# Altium PCB 555TIMER-PCB-REF2.PcbDoc
Units mil, origin at the board's own origin, x right, y up, seen from the top; angles counter-clockwise.
Board outline 3500 x 1300 mil, 2 copper layers (Top Layer, Bottom Layer), stack 61.756 mil thick; 25 components, 12 nets, 69 pads, 9 vias.
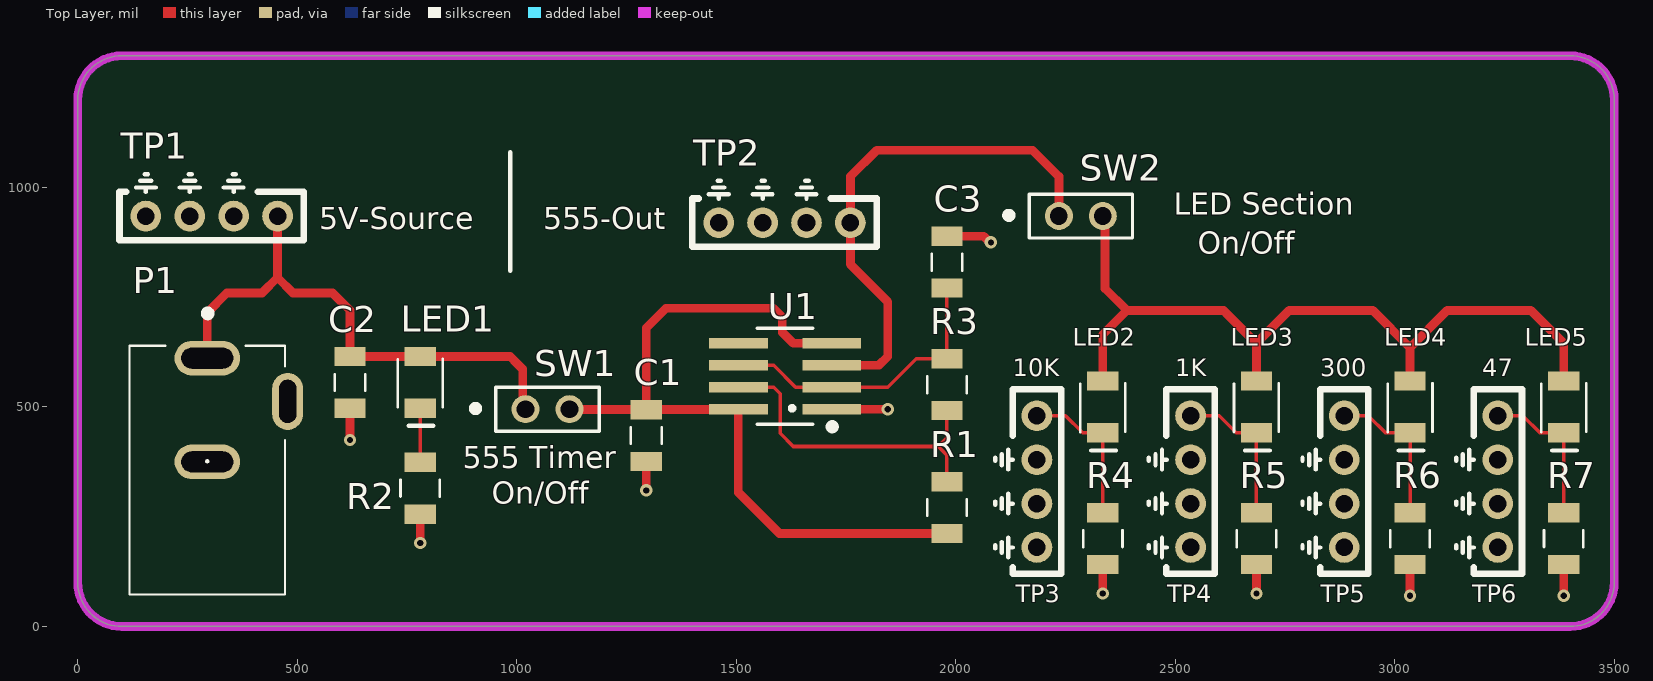
[diagram p0: Top Layer view]
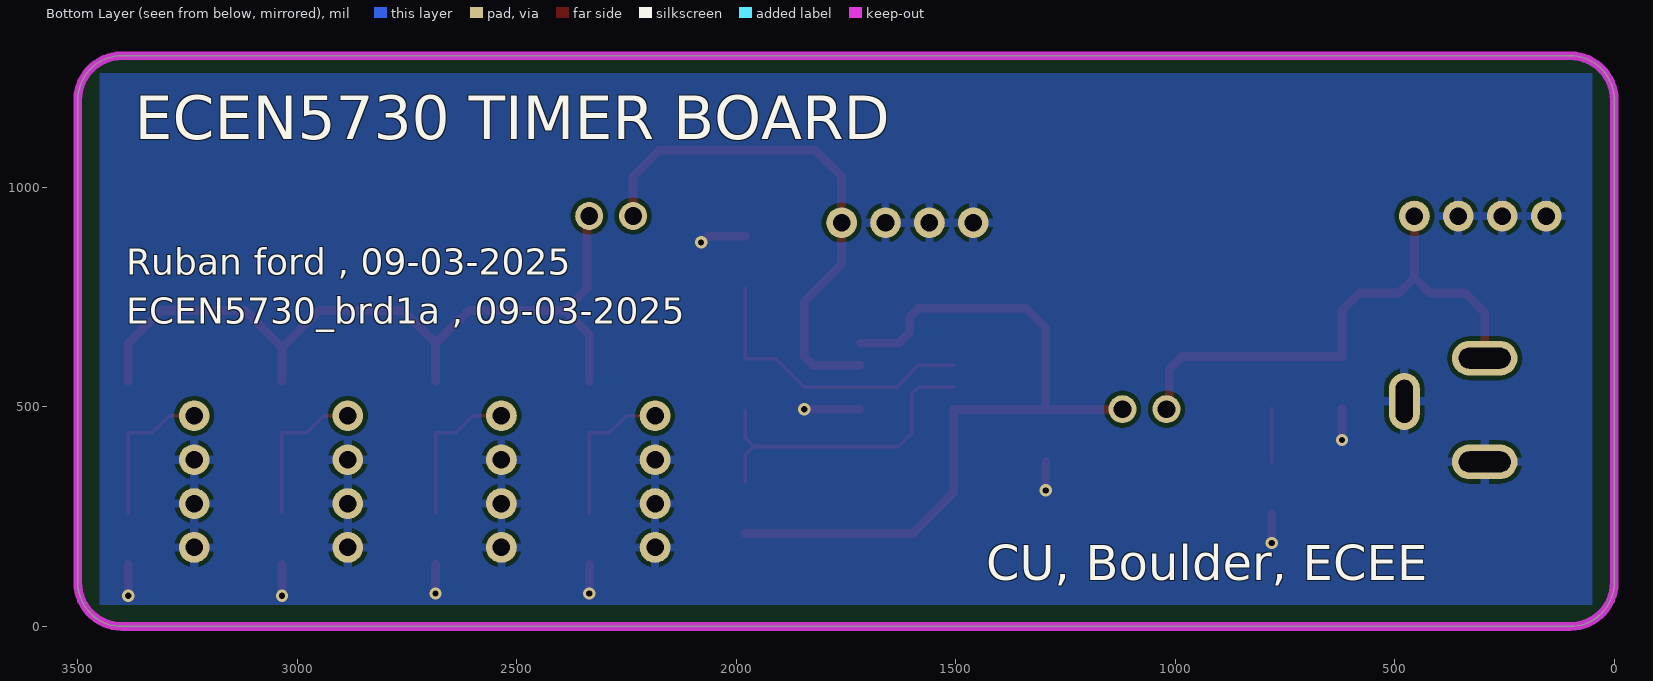
[diagram p1: Bottom Layer view, seen from below]
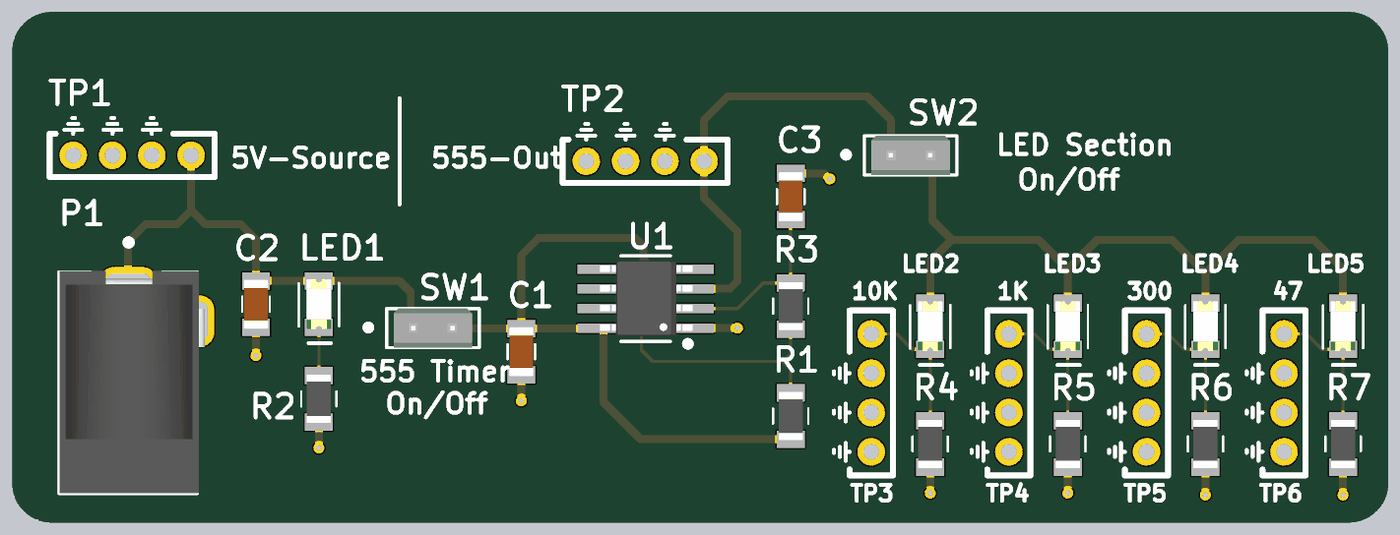
[diagram p2: 3D render of the assembled board from above, using the file's embedded part models]

## Layer stack, top to bottom
Top Solder: solder mask 1, SM-001, Dk 4
Top Layer: signal copper 1.378
Dielectric 1: core 59, Core-043, Dk 4.3
Bottom Layer: signal copper 1.378
Bottom Solder: solder mask 1, SM-001, Dk 4

## Board outline
0,100 0,1200 cw(c100,1200) 100,1300 3400,1300 cw(c3400,1200) 3500,1200 3500,100 cw(c3400,100) 3400,0 100,0 cw(c100,100)

## Design rules (kind name [scope] priority, off if disabled: settings)
AssemblyTestPointUsage [All] p1: isadvanced=TRUE
AssemblyTestpoint [All] p1: isadvanced=TRUE testpointundercomponent=TRUE minsize=40 maxsize=100 preferedsize=60 minholesize=0 maxholesize=40 preferedholesize=32 testpointgrid=1 usegrid=TRUE gridtolerance=0.01 allowsidetop=TRUE allowsidebottom=TRUE
BoardOutlineClearance BoardOutlineClearance_1 [All] p1: isadvanced=TRUE gap=20 ignorepadtopadclearanceinfootprint=FALSE
Clearance Clearance_1 [OnMid vs OnMid] p1: gap=10 ignorepadtopadclearanceinfootprint=FALSE sourcerule=54 cellrowname=All cellrowtype=0 cellcolname=All cellcoltype=0 innerlayers=TRUE
Clearance Clearance_2 [(ExistsOnLayer('Top Layer') Or ExistsOnLayer('Bottom Layer')) vs (ExistsOnLayer('Top Layer') Or ExistsOnLayer('Bottom Layer'))] p2: gap=10 ignorepadtopadclearanceinfootprint=FALSE sourcerule=54 cellrowname=All cellrowtype=0 cellcolname=All cellcoltype=0 outerlayers=TRUE
Clearance [All] p3: gap=10 ignorepadtopadclearanceinfootprint=FALSE ismatrix=TRUE miname0=Power mitype0=2 miname1=DEFAULT mitype1=2 miname2=GND mitype2=2
ComponentClearance [All] p1: isadvanced=TRUE gap=10 collisioncheckmode=3 verticalgap=10 showdistances=FALSE
FabricationTestPointUsage [All] p1: isadvanced=TRUE valid=0 allowmultiple=FALSE
FabricationTestpoint [All] p1: isadvanced=TRUE side=3 testpointundercomponent=TRUE minsize=40 maxsize=100 preferedsize=60 minholesize=0 maxholesize=40 preferedholesize=32 testpointgrid=1 allowsidetop=TRUE allowsidebottom=TRUE usegrid=TRUE gridtolerance=0.01
FanoutControl Fanout_BGA [IsBGA] p1: isadvanced=TRUE bgadir=Out bgaviamode=Centered fanoutstyle=Auto fanoutdirection=Alternating viagrid=1 // Fanout_BGA (Default Rule)
FanoutControl Fanout_LCC [IsLCC] p2: isadvanced=TRUE bgadir=Out bgaviamode=Centered fanoutstyle=Auto fanoutdirection=Alternating viagrid=1 // Fanout_LCC (Default Rule)
FanoutControl Fanout_SOIC [IsSOIC] p3: isadvanced=TRUE bgadir=Out bgaviamode=Centered fanoutstyle=Auto fanoutdirection=Alternating viagrid=1 // Fanout_SOIC (Default Rule)
FanoutControl Fanout_Small [(CompPinCount < 5)] p4: isadvanced=TRUE bgadir=Out bgaviamode=Centered fanoutstyle=Auto fanoutdirection=OutThenIn viagrid=1 // Fanout_Small (Default Rule)
FanoutControl Fanout_Default [All] p5: isadvanced=TRUE bgadir=Out bgaviamode=Centered fanoutstyle=Auto fanoutdirection=Alternating viagrid=1 // Fanout_Default (Default Rule)
Height [All] p1: isadvanced=TRUE minheight=0 maxheight=1000 prefheight=500
HoleSize [All] p1: isadvanced=TRUE absolutevalues=TRUE maxlimit=120 minlimit=1 maxpercent=80.000 minpercent=20.000
HoleToHoleClearance [All] p1: isadvanced=TRUE gap=10 allowstackedmicrovias=TRUE
LayerPairs [All] p1: isadvanced=TRUE enforce=TRUE
MinimumAnnularRing MinimumAnnularRing_1 [All] p1: isadvanced=TRUE minimumring=5
MinimumSolderMaskSliver [All] p1: isadvanced=TRUE minsoldermaskwidth=10
NetAntennae [All] p1: isadvanced=TRUE netantennaetolerance=0
PasteMaskExpansion [All] p1: isadvanced=TRUE expansion=0
PlaneClearance [All] p1: isadvanced=TRUE clearance=20
PlaneConnect [All] p1: isadvanced=TRUE pad.planeconnectstyle=Relief pad.reliefexpansion=20 pad.reliefentries=4 pad.reliefconductorwidth=10 pad.reliefairgap=10 via.planeconnectstyle=Direct via.reliefexpansion=20 via.reliefentries=4 via.reliefconductorwidth=10 via.reliefairgap=10
PolygonConnect PolygonConnectStyle_1 [InNetClass('Power')] p1: thpad.connectstyle=Relief thpad.reliefconductorwidth=20 thpad.reliefentries=4 thpad.polygonreliefangle="90 Angle" thpad.airgapwidth=10 smdpad.connectstyle=Relief smdpad.reliefconductorwidth=20 smdpad.reliefentries=4 smdpad.polygonreliefangle="90 Angle" smdpad.airgapwidth=10 via.connectstyle=Direct via.reliefconductorwidth=10 via.reliefentries=4 via.polygonreliefangle="90 Angle" via.airgapwidth=10
PolygonConnect PolygonConnectStyle_2 [InNetClass('GND')] p2: thpad.connectstyle=Relief thpad.reliefconductorwidth=20 thpad.reliefentries=4 thpad.polygonreliefangle="90 Angle" thpad.airgapwidth=10 smdpad.connectstyle=Relief smdpad.reliefconductorwidth=20 smdpad.reliefentries=4 smdpad.polygonreliefangle="90 Angle" smdpad.airgapwidth=10 via.connectstyle=Direct via.reliefconductorwidth=10 via.reliefentries=4 via.polygonreliefangle="90 Angle" via.airgapwidth=10
PolygonConnect PolygonConnectStyle_3 [InNetClass('DEFAULT')] p3: thpad.connectstyle=Relief thpad.reliefconductorwidth=20 thpad.reliefentries=4 thpad.polygonreliefangle="90 Angle" thpad.airgapwidth=10 smdpad.connectstyle=Relief smdpad.reliefconductorwidth=20 smdpad.reliefentries=4 smdpad.polygonreliefangle="90 Angle" smdpad.airgapwidth=10 via.connectstyle=Direct via.reliefconductorwidth=10 via.reliefentries=4 via.polygonreliefangle="90 Angle" via.airgapwidth=10
PolygonConnect PolygonConnectStyle_4 [InxNetClass('All xNets')] p4: thpad.connectstyle=Relief thpad.reliefconductorwidth=20 thpad.reliefentries=4 thpad.polygonreliefangle="90 Angle" thpad.airgapwidth=10 smdpad.connectstyle=Relief smdpad.reliefconductorwidth=20 smdpad.reliefentries=4 smdpad.polygonreliefangle="90 Angle" smdpad.airgapwidth=10 via.connectstyle=Direct via.reliefconductorwidth=10 via.reliefentries=4 via.polygonreliefangle="90 Angle" via.airgapwidth=10
PolygonConnect PolygonConnectStyle_5 [InDifferentialPairClass('All Differential Pairs')] p5: thpad.connectstyle=Relief thpad.reliefconductorwidth=20 thpad.reliefentries=4 thpad.polygonreliefangle="90 Angle" thpad.airgapwidth=10 smdpad.connectstyle=Relief smdpad.reliefconductorwidth=20 smdpad.reliefentries=4 smdpad.polygonreliefangle="90 Angle" smdpad.airgapwidth=10 via.connectstyle=Direct via.reliefconductorwidth=10 via.reliefentries=4 via.polygonreliefangle="90 Angle" via.airgapwidth=10
PolygonConnect PolygonConnectStyle_6 [All] p6: thpad.connectstyle=Relief thpad.reliefconductorwidth=20 thpad.reliefentries=4 thpad.polygonreliefangle="90 Angle" thpad.airgapwidth=10 smdpad.connectstyle=Relief smdpad.reliefconductorwidth=20 smdpad.reliefentries=4 smdpad.polygonreliefangle="90 Angle" smdpad.airgapwidth=10 via.connectstyle=Direct via.reliefconductorwidth=10 via.reliefentries=4 via.polygonreliefangle="90 Angle" via.airgapwidth=10
RoutingCorners [All] p1: isadvanced=TRUE cornerstyle=45-Degree minsetback=100 maxsetback=100
RoutingPriority [All] p1: isadvanced=TRUE routingpriority=0
RoutingVias RoutingViaStyle_1 [InNetClass('Power')] p1: holewidth=14 width=28 viastyle="Through Hole" minholewidth=14 minwidth=28 maxholewidth=14 maxwidth=28
RoutingVias RoutingViaStyle_2 [InNetClass('GND')] p2: holewidth=14 width=28 viastyle="Through Hole" minholewidth=14 minwidth=28 maxholewidth=14 maxwidth=28
RoutingVias RoutingViaStyle_3 [InNetClass('DEFAULT')] p3: holewidth=14 width=28 viastyle="Through Hole" minholewidth=14 minwidth=28 maxholewidth=14 maxwidth=28
RoutingVias RoutingViaStyle_4 [InxNetClass('All xNets')] p4: holewidth=14 width=28 viastyle="Through Hole" minholewidth=14 minwidth=28 maxholewidth=14 maxwidth=28
RoutingVias RoutingViaStyle_5 [InDifferentialPairClass('All Differential Pairs')] p5: holewidth=14 width=28 viastyle="Through Hole" minholewidth=14 minwidth=28 maxholewidth=14 maxwidth=28
RoutingVias RoutingViaStyle_6 [All] p6: holewidth=14 width=28 viastyle="Through Hole" minholewidth=14 minwidth=28 maxholewidth=14 maxwidth=28
ShortCircuit [All] p1: isadvanced=TRUE allowed=FALSE
SilkToSilkClearance [All] p1: isadvanced=TRUE silktosilkclearance=10
SilkToSolderMaskClearance [IsPad] p1: isadvanced=TRUE minsilkscreentomaskgap=10 clearancetoexposedcopper=TRUE
SolderMaskExpansion [All] p1: isadvanced=TRUE expansion=4 istentingtop=FALSE
SupplyNets "Schematic Supply Nets_2" [InNet('+5V-SOURCE')] p1: isadvanced=TRUE voltage=0.000
SupplyNets "Schematic Supply Nets_1" [InNet('GND')] p2: isadvanced=TRUE voltage=0.000
SupplyNets "Schematic Supply Nets" [InNet('+5V-TIMER')] p3: isadvanced=TRUE voltage=0.000
UnRoutedNet [All] p1: isadvanced=TRUE checkbadconnections=TRUE
UnpouredPolygon [All] p1: isadvanced=TRUE
Width MaxMinWidth_1 [InNetClass('Power')] p1: maxlimit=20 minlimit=15 preferedwidth=20 minimp=50.000000 maximp=50.000000 favimp=50.000000
Width MaxMinWidth_2 [InNetClass('GND')] p2: maxlimit=20 minlimit=15 preferedwidth=20 minimp=50.000000 maximp=50.000000 favimp=50.000000
Width MaxMinWidth_3 [InNetClass('DEFAULT')] p3: maxlimit=8 minlimit=8 preferedwidth=8 minimp=50.000000 maximp=50.000000 favimp=50.000000
Width [All] p4: maxlimit=8 minlimit=8 preferedwidth=8 minimp=50.000000 maximp=50.000000 favimp=50.000000
4 further rules are at their usual default settings.

## Classes and differential pairs
net class DEFAULT: 555-DISCHARGE 555-TRI-THRES LED-1K LED-10K LED-47 LED-300 LED-SOURCE
net class GND: GND
net class Power: 555-OUTPUT +5V-LED +5V-SOURCE +5V-TIMER

## Components (designator, comment, footprint, x,y, rotation, side; value= is the part's Value field where it differs from the comment)
C1 "22uF" 1206_Passive_Capacitor 1295,435 r90 top
C2 "22uF" 1206_Passive_Capacitor 620,556 r90 top
C3 "1uF" 1206_Passive_Capacitor 1980,830 r270 top
LED1 "Red" LED_1206 780,556 r270 top
LED2 "Green" LED_1206 2335,500 r270 top
LED3 "Green" LED_1206 2685,500 r270 top
LED4 "Green" LED_1206 3035,500 r270 top
LED5 "Green" LED_1206 3385,500 r270 top
P1 "Power Jack" Power_Jack 295,611.22 r270 top value="CONN PWR JACK 2X5.5MM SOLDER"
R1 "1k" 1206_Passive_Resitor 1980,271 r270 top value="1K Ohm"
R2 "1k" 1206_Passive_Resitor 780,315 r90 top value="1K Ohm"
R3 "1k" 1206_Passive_Resitor 1980,551 r270 top value="1K Ohm"
R4 "10k" 1206_Passive_Resitor 2335,200 r90 top value=10KOhm
R5 "1k" 1206_Passive_Resitor 2685,200 r90 top value="1K Ohm"
R6 "300 Ohm" 1206_Passive_Resitor 3035,200 r90 top value=300Ohm
R7 "47 Ohms" 1206_Passive_Resitor 3385,200 r90 top value=47Ohm
SW1 "SW_2Pin_100mil_Switch" 2Pin-Header-Conn 1020,495 r0 top
SW2 "SW_2Pin_100mil_Switch" 2Pin-Header-Conn 2235,935 r0 top
TP1 "TP-5V" TP10x_Probe 305,935 r180 top
TP2 "TP-OUT" TP10x_Probe 1610,920 r180 top
TP3 "TP-10KOhm" TP10x_Probe 2185,330 r270 top
TP4 "TP-1KOhm" TP10x_Probe 2535,330 r270 top
TP5 "TP-300Ohm" TP10x_Probe 2885,330 r270 top
TP6 "TP-47Ohm" TP10x_Probe 3235,330 r270 top
U1 "NE555DR" TS555IDTTR 1611.3,570 r180 top

## Footprints (in the part's own frame and the unit in brackets; to place one, negate y for a bottom-side part, rotate by r counter-clockwise, add the part's x,y. Pads: shape width x height; smd on the part's side, far side on the other; paste and mask are expansions set on the pad)
2Pin-Header-Conn [mm]
  round 1.62 hole 1.02: 1(0,0) 2(2.54,0)
  silkscreen extent -3.02,-1.27 4.26,1.26, body extent -1.27,-1.27 3.81,1.27, height 8.13
1206_Passive_Capacitor [mil]
  rect 44x71 smd: 1(-59,0) 2(59,0)
  silkscreen extent -19,-35 19,35, body extent -63,-31 63,32, height 50
1206_Passive_Resitor [mil]
  rect 44x71 smd: 1(-59,0) 2(59,0)
  silkscreen extent -19,-45 19,45, body extent -61,-31 61,31, height 26
LED_1206 [mil]
  rect 44x71 smd: 1(-59,0) 2(59,0)
  silkscreen extent -54,-51 99,51, body extent -63,-31 63,31, height 28
Power_Jack [mm]
  oval 2x3.8 hole 1.2 slot 3 at 90 deg: 1(0,0) 2(6,0)
  oval 3.3x1.8 hole 1 slot 2.5 at 0 deg: 3(2.5,4.65)
  silkscreen extent -2.79,-4.5 13.68,4.5, body extent -0.76,-4.45 13.64,4.95, height 11.49
TP10x_Probe [mil] "Small Probs footprint"
  round 70 hole 40: 1(-150,0) 2(-50,0) 2(50,0) 2(150,0)
  silkscreen extent -210,-95 210,55
TS555IDTTR [mm] "IC OSC Single Timer 2.7MHz 8SOIC"
  rect 3.4x0.6 smd: 1(-2.7,1.905) 2(-2.7,0.635) 3(-2.7,-0.635) 4(-2.7,-1.905) 5(2.7,-1.905) 6(2.7,-0.635) 7(2.7,0.635) 8(2.7,1.905)
  silkscreen extent -2.85,-2.77 1.6,3.05, body extent -3.03,-2.48 2.96,2.43, height 1.75

## Part data
C1 C2: library part C_22uF_1206, "22uF ±10% 25V X5R 1206 Multilayer Ceramic Capacitors MLCC - SMD/SMT RoHS", LCSC Part#=C12891, MFR Part #=CL31A226KAHNNNE, Datasheet=https://datasheet.lcsc.com/lcsc/1811031514_Samsung-Electro-Mechanics-CL31A226KAHNNNE_C12891.pdf, Type=basic
C3: library part C_1uF_1206, "MULTILAYER CERAMIC CAPACITORS MLCC - SMD/SMT 1UF 50V 1206 ROHS", LCSC Part#=C1848, MFR Part #=CL31B105KBHNNNE, Digikey Link=https://www.digikey.com/product-detail/en/C1206C105M4RACTU/399-8150-1-ND/3471873/?itemSeq=304982366, Type=Basic
LED1: library part LED_RED_1206, "Red 621~631nm 1206 Light Emitting Diodes (LED) RoHS", LCSC Part#=C93133, MFR Part #=15-21/R6C-FQ1R1B/2T, Datasheet=https://datasheet.lcsc.com/szlcsc/1811151241_Everlight-Elec-15-21-R6C-FQ1R1B-2T_C93133.pdf, Type=Extended
LED2 LED3 LED4 LED5: library part LED_GREEN_1206, "Green 513~528nm 1206 Light Emitting Diodes (LED) RoHS", LCSC Part#=C434439, MFR Part #=SZYY1206G, Datasheet=https://datasheet.lcsc.com/lcsc/2006301532_Yongyu-Photoelectric-SZYY1206G_C434439.pdf, Type=Extended
P1: library part "P_Power Jack", "Power Barrel Connector Jack 2.10mm ID (0.083\"), 5.50mm OD (0.217\") Through Hole, Right Angle", LCSC Part#=C136744, MFR Part #=PJ-102A, Digikey Link=https://www.digikey.com/product-detail/en/PJ-102A/CP-102A-ND/275425/?itemSeq=304982367, Type=Extended
R1 R2 R3 R5: library part R_1K_1206, "CHIP RESISTOR - SURFACE MOUNT 1KOHMS ±1% 1/4W 1206 ROHS", LCSC Part#=C4410, MFR Part #=RNCP1206FTD1K00CT, Digikey Link=https://www.digikey.com/product-detail/en/RNCP1206FTD1K00/RNCP1206FTD1K00CT-ND/2240675/?itemSeq=304982373, Type=Basic
R4: library part R_10KOhm_1206, "10 kOhms ±5% 0.25W, 1/4W Chip Resistor 1206 (3216 Metric) Automotive AEC-Q200 Thick Film", LCSC Part#=C17902, MFR Part #=RMCF1206FT10K0, Digikey Link=https://www.digikey.com/en/products/detail/stackpole-electronics-inc/RMCF1206FT10K0/1759669, Type=Basic
R6: library part R_300Ohm_1206, "CHIP RESISTOR - SURFACE MOUNT 300OHMS ±1% 1/4W 1206 ROHS", LCSC Part#=C17887, MFR Part #=1206W4F3000T5E, Datasheet=https://datasheet.lcsc.com/szlcsc/Uniroyal-Elec-1206W4F3000T5E_C17887.pdf, Type=Basic
R7: library part R_47Ohm_1206, "47Ω ±5% 0.25W ±200ppm/℃ 1206 Chip Resistor - Surface Mount RoHS", LCSC Part#=C25384, MFR Part #=1206W4J0470T5E, Datasheet=https://datasheet.lcsc.com/lcsc/1811101020_UNI-ROYAL-Uniroyal-Elec-1206W4J0470T5E_C25384.pdf, Type=Extended
SW1 SW2: "2Pin Header", LCSC Part#=C124375, Type=Extended
TP1 TP2 TP3 TP4 TP5 TP6: library part TP_10x_Probe, "Test Point 300 mil centers"
U1: library part U_555_Slow, "555 Timer SOIC-8_150MIL ROHS 150ns Rise Time", LCSC Part#=C7593, Digikey Link=https://www.digikey.com/product-detail/en/texas-instruments/NE555DR/296-6501-1-ND/372490, MFR Part #=NE555DR, Type=Basic

## Via types
v1: diameter 28, hole 14, Top Layer to Bottom Layer, 9 vias

## Nets (pads, with @x,y where several pads share a name; then routed paths per layer and width w, separated by ;. In a path a pad name is that pad's centre, name@x,y a point inside that pad or via, vN(x,y) a via of type N, cw(c..) or ccw(c..) an arc to the next point about the centre after c; other vN are vias at no path point)
555-DISCHARGE: R1.1 R3.2 U1.7 | length 742.2
  Top Layer w8: U1.7 1585,545 1600,530 1600,440 1630,410 1960,410 ; R1.1 1980,390 1960,410 ; R3.2 1980,430 1960,410
555-OUTPUT: SW2.1 TP2.1 U1.3 | length 1195.6
  Top Layer w20: U1.3 1825,595 1845,615 1845,740 1760,825 TP2.1 1760,1025 1820,1085 2175,1085 2235,1025 SW2.1
555-TRI-THRES: C3.2 R3.1 U1.2 U1.6 | length 683.6
  Top Layer w8: U1.6 1585,595 1635,545 U1.2 1845,545 1910,610 R3.1 C3.2
+5V-LED: LED2.1 LED3.1 LED4.1 LED5.1 SW2.2 | length 1828.2
  Top Layer w20: LED2.1 2335,665 2390,720 ; SW2.2 2340,930 2340,770 2390,720 ; LED3.1 2685,645 ; LED4.1 3035,635 ; LED5.1 3385,645 3310,720 3120,720 3035,635 ; 2390,720 2610,720 2619.97,710.03 2685,645 ; 2685,645 2760,720 2950,720 3035,635
+5V-SOURCE: C2.2 LED1.1 P1.1 SW1.1 TP1.1 | length 1237.5
  Top Layer w20: P1.1 295,715 340,760 420,760 455,795 ; TP1.1 455,795 ; SW1.1 1013.74,501.26 1013.74,586.26 1000,600 985,615 LED1.1 C2.2 620,720 580,760 490,760 455,795
+5V-TIMER: C1.2 R1.2 SW1.2 U1.4 U1.8 | length 1769.9
  Top Layer w20: SW1.2 1120.5,494.5 1294.5,494.5 C1.2 ; U1.8 U1.8@1504.5,494.5 ; U1.4 1630,645 1605,670 1605,705 1585,725 1340,725 1295,680 C1.2 ; R1.2 1598,212 1504.5,305.5 U1.8@1504.5,494.5 ; C1.2 1295.5,494.5 U1.8@1504.5,494.5
GND: C1.1 C2.1 C3.1 P1.2 P1.3 R2.1 R4.1 R5.1 R6.1 R7.1 TP1.2 TP2.2 TP3.2 TP4.2 TP5.2 TP6.2 U1.1 | length 711.2
  Top Layer w20: v1(620,425) C2.1 ; v1(780,190) R2.1 ; v1(1295,310) C1.1 ; U1.1 v1(1845,495) ; C3.1 2063.84,889 2077.84,875 v1(2080,875) ; v1(2335,75) R4.1 ; v1(2685,75) R5.1 ; v1(3035,70) R6.1 ; v1(3385,70) R7.1
LED-1K: LED3.2 R5.2 TP4.1 | length 348.2
  Top Layer w8: TP4.1 2600,480 2639,441 LED3.2 R5.2
LED-10K: LED2.2 R4.2 TP3.1 | length 348.2
  Top Layer w8: TP3.1 2250,480 2289,441 LED2.2 R4.2
LED-47: LED5.2 R7.2 TP6.1 | length 348.2
  Top Layer w8: TP6.1 3292,480 3331,441 LED5.2 R7.2
LED-300: LED4.2 R6.2 TP5.1 | length 348.2
  Top Layer w8: TP5.1 2940,480 2979,441 LED4.2 R6.2
LED-SOURCE: LED1.2 R2.2 | length 123
  Top Layer w8: R2.2 LED1.2
pads on no net: U1.5

## Polygon pours and split planes (outlines as drawn)
GND on Bottom Layer "GND_L02_P000" (solid, pour order 0): 50,50 3450,50 3450,1260 50,1260

## Keep-outs
Keep-Out Layer:
  the board outline again, w20

## Other copper
Top Layer:
  pour cut-out: 1794.53,666.81 1795.72,668 1966,668 1966,530 1965.27,530.73 1794.53,530.73
  pour cut-out: 3339.5,227 3339.5,173 3430.5,173 3430.5,227
  pour cut-out: 2989.5,227 2989.5,173 3080.5,173 3080.5,227
  pour cut-out: 2639.5,227 2639.5,173 2730.5,173 2730.5,227
  pour cut-out: 2289.5,227 2289.5,173 2380.5,173 2380.5,227
  pour cut-out: 1934.5,298 1934.5,244 2025.5,244 2025.5,298
  pour cut-out: 1934.5,578 1934.5,524 2025.5,524 2025.5,578
  pour cut-out: 1934.5,857 1934.5,803 2025.5,803 2025.5,857
  pour cut-out: 1249.5,462 1249.5,408 1340.5,408 1340.5,462
  pour cut-out: 734.5,342 734.5,288 825.5,288 825.5,342
  pour cut-out: 574.5,583 574.5,529 665.5,529 665.5,583
  pour cut-out: 1428.07,666.81 1428.07,474.11 1581.01,474.11 1580,475.12 1580,510 1791.34,510 1794.53,513.19 1794.53,666.81

## Silkscreen, mask and mechanical layers (free items; w line width, h text height)
Top Overlay:
  lines w10: 985,810 985,1080
  text "LED Section" at 2496.93,937.94 h50
  text "5V-Source" at 550,905 h50
  text "555-Out" at 1060,905 h50
  text "On/Off" at 2551,849.14 h50
  text "10K" at 2130,570 h40
  text "1K" at 2500,570 h40
  text "300" at 2830,570 h40
  text "47" at 3200,570 h40
  text "555 Timer" at 876.93,360.94 h50
  text "On/Off" at 943,279.14 h50
Bottom Overlay:
  text "ECEN5730 TIMER BOARD" at 3370,1110 h100
  text "Ruban ford , 09-03-2025" at 3390,801.43 h60
  text "ECEN5730_brd1a , 09-03-2025" at 3390,690 h60
  text "CU, Boulder, ECEE" at 1430,105.23 h80